# EAGLE board wagband_chestpiece_postroute (EAGLE 7.5.0)
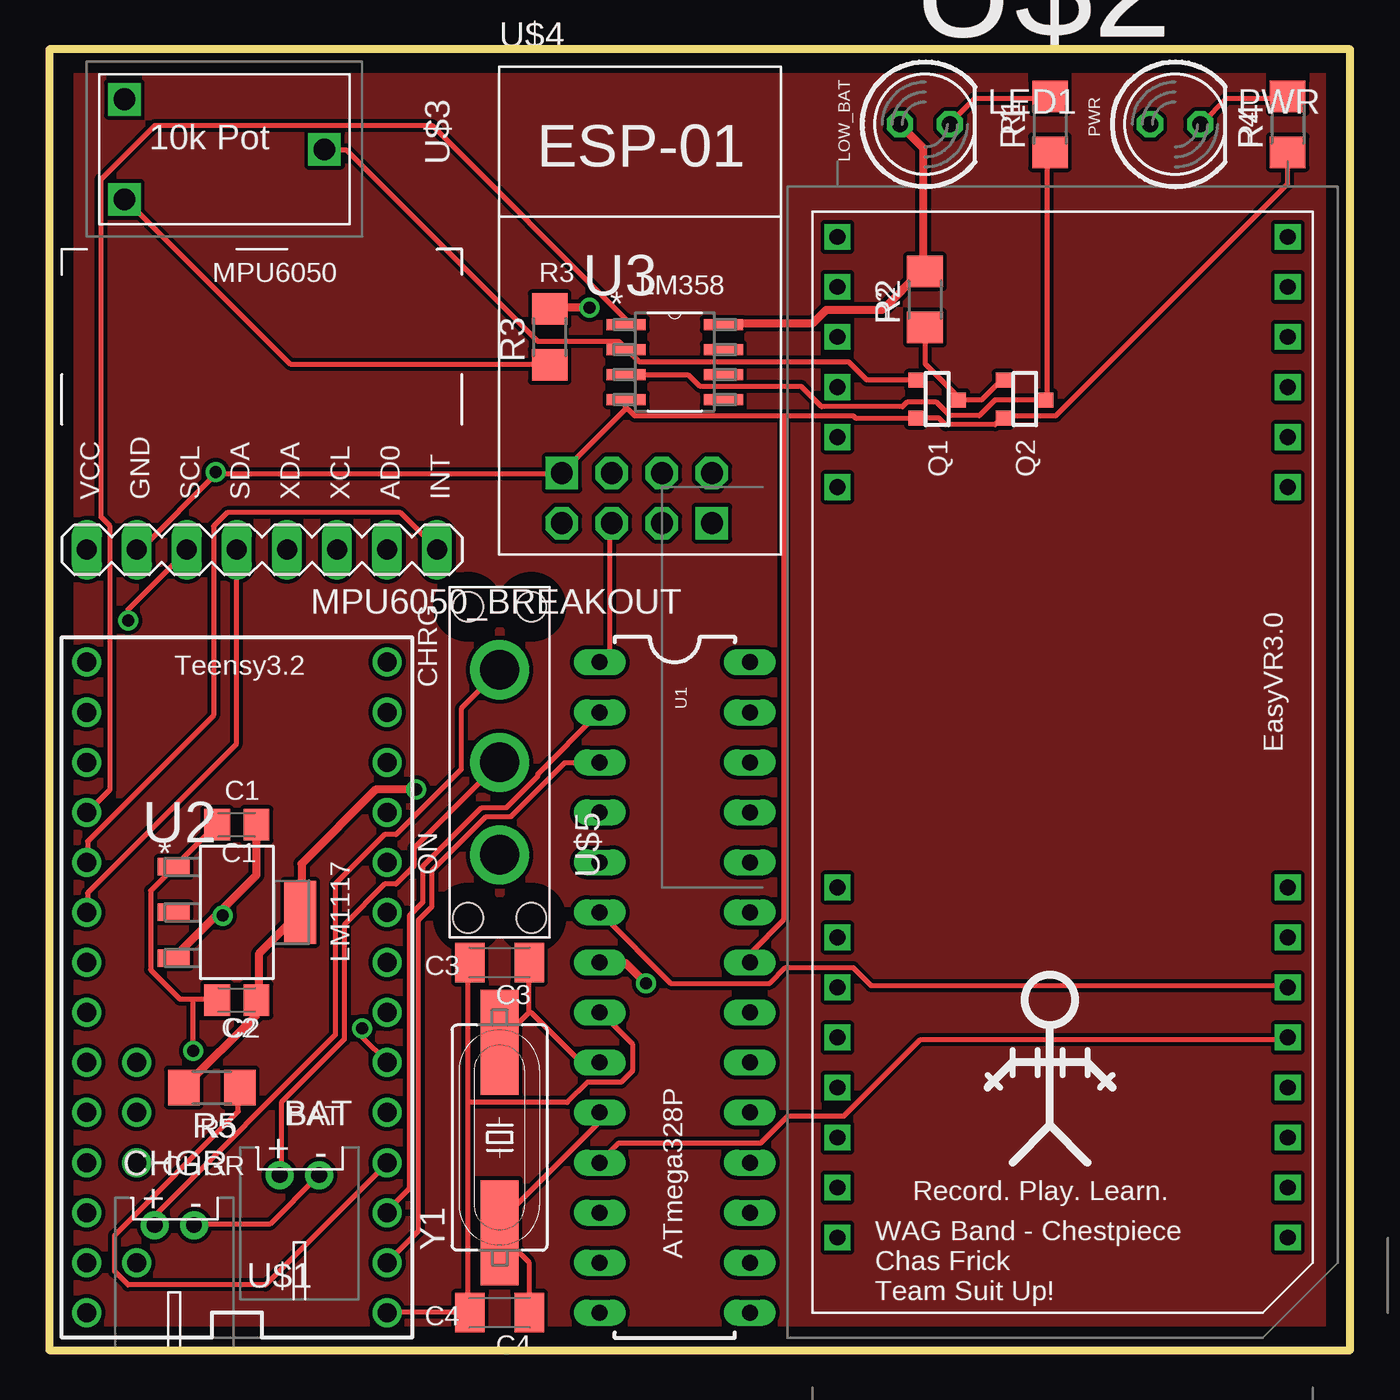
[diagram p0: board, top side]
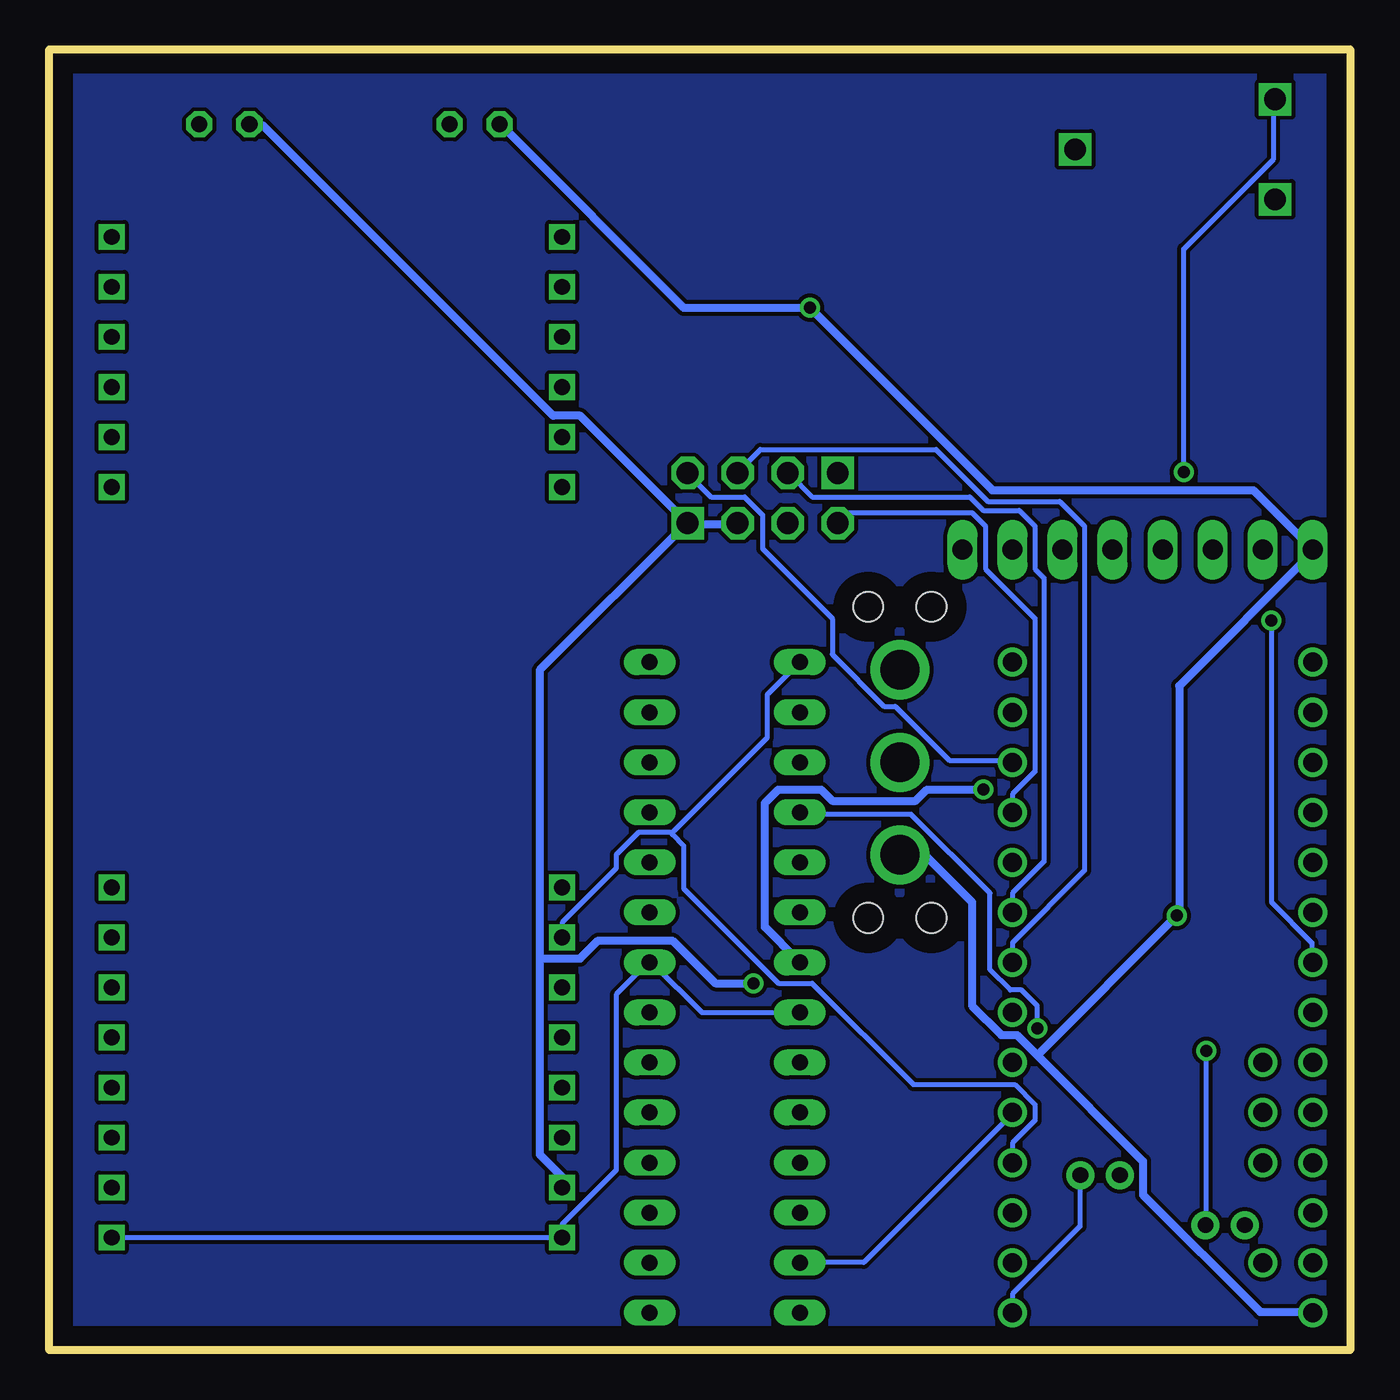
[diagram p1: board, bottom side, seen from below]

Size 66.04 x 66.04 mm. Coordinates in mm from the lower left corner, seen from the top.
Outline: 0,0 66.04,0 66.04,66.04 0,66.04 0,0
Copper layers (1*16): Top 0.035mm / dielectric 1.5mm / Bottom 0.035mm
Design rules "default": minimum track width 10mil, minimum drill 24mil, track to track 8mil, track to pad 8mil, pad to pad 8mil, via to via 8mil, smd to smd 8mil, copper to edge 40mil, drill to drill 8mil, minimum pad ring 10mil, minimum via ring 8mil, stop-mask expansion 4mil, vias tented up to drill 0mil, thermal gap 10mil
Net classes: 1 GND: width 0.406 mm; 2 PWR: width 0.406 mm

## Footprints (pad centres in the part's own frame; a part is rotated, then mirrored left to right if it is on the bottom)
JST-PH-2-THM-RA = drill 0.8 pad 1.422: 1 1,0; 2 -1,0
C0805K = smd 1.3 x 1.6: 1 -1,0; 2 1,0
C1206K = smd 1.5 x 2: 1 -1.5,0; 2 1.5,0
LED5MM = drill 0.813 octagon: A -1.27,0; K 1.27,0
MPU6050 = drill 1.016 long: ADD 6.35,0; GND -6.35,0; INT 8.89,0; SCL -3.81,0; SDA -1.27,0; VCC -8.89,0; XCL 3.81,0; XDA 1.27,0
SOT-23 = smd 0.762 x 0.762: 1 -0.979,-1.101; 2 0.94,-1.101; 3 0.025,1.067
R1206 = smd 1.6 x 1.803: 1 -1.422,0; 2 1.422,0
DIL28-3 = drill 0.813 long: 1 -16.51,-3.81; 2 -13.97,-3.81; 3 -11.43,-3.81; 4 -8.89,-3.81; 5 -6.35,-3.81; 6 -3.81,-3.81; 7 -1.27,-3.81; 8 1.27,-3.81; 9 3.81,-3.81; 10 6.35,-3.81; 11 8.89,-3.81; 12 11.43,-3.81; 13 13.97,-3.81; 14 16.51,-3.81; 15 16.51,3.81; 16 13.97,3.81; 17 11.43,3.81; 18 8.89,3.81; 19 6.35,3.81; 20 3.81,3.81; 21 1.27,3.81; 22 -1.27,3.81; 23 -3.81,3.81; 24 -6.35,3.81; 25 -8.89,3.81; 26 -11.43,3.81; 27 -13.97,3.81; 28 -16.51,3.81
SOT230P700X180-4N = smd 1.626 x 0.889: 1 -3.2,2.311; 2 -3.2,0; 3 -3.2,-2.311 | smd 1.626 x 3.175: 4 3.2,0
SOIC127P600X175-8N = smd 1.981 x 0.559: 1 -2.464,1.905; 2 -2.464,0.635; 3 -2.464,-0.635; 4 -2.464,-1.905; 5 2.464,-1.905; 6 2.464,-0.635; 7 2.464,0.635; 8 2.464,1.905
TEENSY3-DIL+4 = drill 0.965: 0 -7.62,13.97; 1 -7.62,11.43; 2 -7.62,8.89; 3 -7.62,6.35; 3.3V 7.62,11.43; 4 -7.62,3.81; 5 -7.62,1.27; 6 -7.62,-1.27; 7 -7.62,-3.81; 8 -7.62,-6.35; 9 -7.62,-8.89; 10 -7.62,-11.43; 11 -7.62,-13.97; 12 -7.62,-16.51; 13 7.62,-16.51; 14/A0 7.62,-13.97; 15/A1 7.62,-11.43; 16/A2 7.62,-8.89; 17/A3 7.62,-6.35; 18/A4 7.62,-3.81; 19/A5 7.62,-1.27; 20/A6 7.62,1.27; 21/A7 7.62,3.81; 22/A8 7.62,6.35; 23/A9 7.62,8.89; A10 5.08,6.35; A11 5.08,3.81; AGND 7.62,13.97; AREF 5.08,8.89; GND -7.62,16.51; VIN 7.62,16.51; VUSB 5.08,13.97
EASYVR_3_0 = drill 0.8 square: P$1 -11.43,25.4; P$2 -11.43,22.86; P$3 -11.43,20.32; P$4 -11.43,17.78; P$5 -11.43,15.24; P$6 -11.43,12.7; P$7 -11.43,-7.62; P$8 -11.43,-10.16; P$9 -11.43,-12.7; P$10 -11.43,-15.24; P$11 -11.43,-17.78; P$12 -11.43,-20.32; P$13 -11.43,-22.86; P$14 -11.43,-25.4; P$15 11.43,-25.4; P$16 11.43,-22.86; P$17 11.43,-20.32; P$18 11.43,-17.78; P$19 11.43,-15.24; P$20 11.43,-12.7; P$21 11.43,-10.16; P$22 11.43,-7.62; P$23 11.43,12.7; P$24 11.43,15.24; P$25 11.43,17.78; P$26 11.43,20.32; P$27 11.43,22.86; P$28 11.43,25.4
CB10 = drill 1.1 square: P$1 -2.54,-5.08; P$2 2.54,-5.08; P$3 0,5.08
ESP01 = drill 1.1 octagon: CH_PD -1.285,-8.178; GPIO0 1.255,-5.638; GPIO2 -1.285,-5.638; RST 1.255,-8.178; RX 3.795,-5.638; TX -3.825,-8.178 | drill 1.1 square: GND -3.825,-5.638; VCC 3.795,-8.178
SPDT = drill 2: P$1 0,-4.699; P$2 0,0; P$3 0,4.699 | hole 1.5: 1.6,7.899; -1.6,-7.899; 1.6,-7.899; -1.6,7.899
HC49UP = smd 5.334 x 1.93: 1 -4.826,0; 2 4.826,0

## Placement (x,y rotation side)
BAT  [JST-PH-2-THM-RA]  12.7,8.89 180 top
C1  105  [C0805K]  9.53,26.67 180 top
C2  105  [C0805K]  9.53,17.78 180 top
C3  22pF  [C1206K]  22.86,19.68 180 top
C4  22pF  [C1206K]  22.86,1.91 180 top
CHGR  [JST-PH-2-THM-RA]  6.35,6.35 180 top
LED1  [LED5MM]  44.45,62.23 0 top
MPU6050_BREAKOUT  [MPU6050]  10.79,40.64 0 top
PWR  [LED5MM]  57.15,62.23 0 top
Q1  [SOT-23]  45.09,48.26 270 top
Q2  [SOT-23]  49.53,48.26 270 top
R1  1k  [R1206]  50.8,62.23 90 top
R2  30k  [R1206]  44.45,53.34 90 top
R3  30k  [R1206]  25.4,51.44 90 top
R4  1k  [R1206]  62.87,62.23 90 top
R5  10k  [R1206]  8.26,13.34 180 top
U1  ATMEGA328P_PDIP  [DIL28-3]  31.75,18.41 270 top
U2  TLV1117-33CDCY  [SOT230P700X180-4N]  9.53,22.23 0 top
U3  LM358DR  [SOIC127P600X175-8N]  31.75,50.16 0 top
U$1  TEENSY_3.1_DIL+4  [TEENSY3-DIL+4]  9.53,18.41 180 top
U$2  EASYVR_3_0  [EASYVR_3_0]  51.44,31.11 0 top
U$3  CB10LV103M  [CB10]  8.89,60.96 270 top
U$4  ESP01  [ESP01]  29.84,50.16 0 top
U$5  MS12ASW13  [SPDT]  22.86,29.84 0 top
Y1  16MHz  [HC49UP]  22.86,10.79 90 top

## Library data of the parts
BAT CHGR = adafruit
C1 C2 R1-R5 = resistor
C3 C4 = rcl
LED1 PWR = led
MPU6050_BREAKOUT Q1 Q2 U$2-U$5 = mqp_custom_parts
U1 = SparkFun-DigitalIC
U2 = Texas Instruments_By_element14_Batch_1; MPN: TLV1117-33CDCY; OC_FARNELL: 1494942; OC_NEWARK: 67K8520; PACKAGE: SOT-223-3; SUPPLIER: TEXAS INSTRUMENTS
U3 = Texas Instruments_By_element14_Batch_1; MPN: LM358DR; OC_FARNELL: 1831865; OC_NEWARK: 34K7599; PACKAGE: SOIC-8; SUPPLIER: Texas Instruments
U$1 = Teensy_3_and_LC_Series_Boards_v1.1
Y1 = SparkFun-FreqCtrl

## Nets
3.3V: U$1.3.3V
5V: U$2.P$16
!RST: R5.1 U1.1 U$1.2 U$2.P$8 U$4.CH_PD
+3V3 [PWR]: C2.1 PWR.A R5.2 U1.7 U2.4 U$2.P$13 U$4.RST U$4.VCC
AGND: U$1.AGND
AREF: U$1.AREF
GND: BAT.2 C1.2 C2.2 C3.2 C4.2 CHGR.2 MPU6050_BREAKOUT.GND Q1.2 Q2.2 R4.1 U1.8 U1.22 U2.1 U3.4 U$1.GND U$2.P$14 U$2.P$15 U$3.P$1 U$4.GND
N$1: U1.4 U$1.4
N$2: U$1.10 U$4.RX
N$3: MPU6050_BREAKOUT.SDA U$1.18/A4
N$4: Q1.1 U3.2 U$3.P$3
N$5: U1.11 U$2.P$19
N$6: U1.6 U$2.P$20
N$8: MPU6050_BREAKOUT.INT U$1.17/A3
N$9: Q1.3 Q2.1 R2.1
N$10: Q2.3 R1.1 U3.3
N$11: R3.1 U$3.P$2
N$12: LED1.K R1.2
N$13: U1.2 U$1.1
N$14: U3.1 U$1.16/A2
N$15: PWR.K R4.2
N$16: U1.13 U$1.3
N$17: MPU6050_BREAKOUT.SCL U$1.19/A5
N$18: U$1.6 U$4.GPIO0
N$19: U$1.9 U$4.TX
N$20: C3.1 U1.9 Y1.2
N$21: C4.1 U1.10 Y1.1
N$22: U1.3 U$1.0
N$23: BAT.1 U$5.P$2
N$24: U$1.7 U$4.GPIO2
N$25: CHGR.1 U$5.P$3
V+ [PWR]: C1.1 LED1.A MPU6050_BREAKOUT.VCC R2.2 R3.2 U2.3 U3.8 U$1.VIN U$5.P$1
VDD: U$2.P$23
VUSB: U$1.VUSB

## Tracks (layer width: path | path; a pad name or v marks a point on that pad's centre or on a via)
!RST
  Top 0.254: R5.1 9.6,13.26 9.6,12.12 3.31,5.83 3.31,4 4,3.31 10.97,3.31 17.14,9.49 U$1.2 | U$4.CH_PD 28.46,41.95 28.46,35.43 28,34.98 U1.1
  Bottom 0.254: U$2.P$8 40.01,21.72 37.26,24.46 37.26,25.15 36.12,26.29 34.4,26.29 | 34.4,26.29 29.6,31.09 29.6,33.26 U1.1 | U$1.2 17.14,10.52 16,11.66 16,12.46 17.03,13.49 22.17,13.49 27.32,18.63 29.03,18.63 33.83,23.43 33.83,25.6 34.4,26.18 34.4,26.29
+3V3  (via drill 0.61)
  Top 0.406: R5.2 6.86,13.37 10.52,17.03 10.52,17.6 C2.1 10.63,17.83 10.63,20.12 12.69,22.17 U2.4 12.8,22.4 12.8,24.69 16.57,28.46 v18.63,28.46 | v30.29,18.63 29.26,19.66 28,19.66 U1.7
  Bottom 0.406: U$2.P$13 40.01,8.8 41.15,9.94 41.15,19.89 | 41.15,19.89 41.15,34.52 33.72,41.95 U$4.VCC | v30.29,18.63 32.23,18.63 34.4,20.8 38.18,20.8 39.09,19.89 41.15,19.89 | PWR.A 55.78,62.18 55.21,62.18 40.46,47.43 39.09,47.43 33.72,42.06 U$4.VCC | U$4.RST 31.2,41.95 33.49,41.95 U$4.VCC | v18.63,28.46 21.49,28.46 22.06,27.89 26.29,27.89 26.86,28.46 29.03,28.46 29.72,27.77 29.72,21.49 28,19.77 U1.7
GND  (via drill 0.61)
  Top 0.254: U$1.GND 17.14,1.94 21.26,1.94 C4.2 21.26,2.06 21.26,12.57 | 21.26,12.57 21.26,19.66 C3.2 | 7.32,17.83 6.63,17.83 5.14,19.32 5.14,23.32 6.29,24.46 U2.1 6.4,24.57 8.46,26.63 C1.2 | 7.32,17.83 8.46,17.83 C2.2 | CHGR.2 7.43,6.4 11.2,6.4 13.6,8.8 BAT.2 | v7.32,15.2 7.32,17.83 | 21.26,12.57 26.29,12.57 27.32,13.6 29.03,13.6 29.6,14.17 29.6,15.54 28,17.14 U1.8 | R4.1 62.87,59.21 51.09,47.43 48.46,47.43 Q2.2 48.35,47.32 48.01,46.98 45.49,46.98 45.15,47.32 Q1.2 40.92,47.32 40.8,47.43 37.26,47.43 | 29.26,47.78 29.26,48.23 U3.4 | 29.26,47.78 26.06,44.58 U$4.GND 25.95,44.46 8.46,44.46 | 8.46,44.46 4.69,40.69 4.46,40.69 MPU6050_BREAKOUT.GND | v8.46,44.58 8.46,44.46 | 37.26,47.43 29.72,47.43 29.38,47.78 29.26,47.78 | 37.26,47.43 37.26,21.83 35.66,20.23 35.66,19.77 U1.22
  Bottom 0.254: v7.32,15.2 7.32,6.4 CHGR.2 | U$1.GND 17.14,2.86 13.72,6.29 13.72,8.8 BAT.2 | U$2.P$15 U$2.P$14 40.01,6.4 37.26,9.14 37.26,18.06 35.66,19.66 U1.22 35.43,19.66 32.92,17.14 U1.8 | v8.46,44.58 8.46,55.89 3.89,60.47 3.89,63.44 U$3.P$1
N$1  (via drill 0.61)
  Top 0.254: v15.89,16.34 15.89,15.89 17.14,14.63 U$1.4
  Bottom 0.254: v15.89,16.34 15.89,17.49 16.69,18.29 17.26,18.29 18.29,19.32 18.29,23.2 22.29,27.2 27.89,27.2 U1.4
N$2
  Bottom 0.254: U$1.10 17.14,29.95 20.34,29.95 23.09,32.69 23.66,32.69 26.29,35.32 26.29,37.15 29.83,40.69 29.83,42.41 30.75,43.32 32.46,43.32 33.6,44.46 U$4.RX
N$3
  Top 0.254: U$1.18/A4 1.94,22.29 1.94,23.2 9.49,30.75 9.49,40.58 MPU6050_BREAKOUT.SDA
N$4
  Top 0.254: Q1.1 43.89,49.26 41.49,49.26 40.58,50.18 29.95,50.18 29.38,50.75 U3.2 29.26,50.86 28.92,51.21 24.8,51.21 15.09,60.92 14.06,60.92 U$3.P$3
N$5
  Top 0.254: U$2.P$19 62.87,15.77 44.23,15.77 40.35,11.89 37.49,11.89 36.12,10.52 28.92,10.52 28,9.6 U1.11
N$6
  Top 0.254: U$2.P$20 62.87,18.52 41.72,18.52 40.8,19.43 37.38,19.43 36.58,18.63 31.55,18.63 28,22.17 U1.6
N$7
  pour Bottom: 0,66.04 0,0 66.04,0 66.04,66.04
N$8
  Top 0.254: U$1.17/A3 1.94,24.8 1.94,25.83 8.34,32.23 8.34,41.83 9.03,42.52 17.83,42.52 19.66,40.69 MPU6050_BREAKOUT.INT
N$9
  Top 0.254: Q2.1 48.35,49.26 47.32,48.23 Q1.3 46.18,48.35 44.46,50.06 44.46,51.89 R2.1
N$10
  Top 0.254: R1.1 50.75,60.81 50.63,60.69 50.63,48.23 Q2.3 48.01,48.23 47.21,47.43 45.72,47.43 45.03,48.12 43.55,48.12 43.32,47.89 39.2,47.89 38.18,48.92 33.03,48.92 32.46,49.49 29.38,49.49 U3.3
N$11
  Top 0.254: R3.1 25.38,50.06 12.23,50.06 3.89,58.41 U$3.P$2
N$12
  Top 0.254: R1.2 50.75,63.55 46.98,63.55 45.72,62.29 LED1.K
N$13
  Top 0.254: U1.2 27.89,32.35 24.8,29.26 24.8,29.15 23.2,27.55 21.95,27.55 18.97,24.57 18.97,22.75 18.29,22.06 18.29,8.23 17.14,7.09 U$1.1
N$14
  Top 0.254: U3.1 29.26,52.12 29.26,52.35 19.43,62.18 5.37,62.18 2.63,59.44 2.63,42.29 3.09,41.83 3.09,28.46 1.94,27.32 U$1.16/A2
N$15
  Top 0.254: R4.2 62.87,63.55 59.78,63.55 58.52,62.29 PWR.K
N$16
  Bottom 0.254: U1.13 27.89,4.46 24.69,4.46 17.14,12 U$1.3
N$17  (via drill 0.61)
  Top 0.254: v4,37.03 4,37.6 6.97,40.58 MPU6050_BREAKOUT.SCL
  Bottom 0.254: v4,37.03 4,22.75 1.94,20.69 1.94,19.77 U$1.19/A5
N$18
  Bottom 0.254: U$1.6 17.14,20.69 13.49,24.35 13.49,41.83 14.74,43.09 18.4,43.09 21.03,45.72 29.95,45.72 31.09,44.58 U$4.GPIO0
N$19
  Bottom 0.254: U$1.9 17.14,28.23 16,29.38 16,37.15 18.52,39.66 18.52,41.83 19.2,42.52 25.49,42.52 25.95,42.06 U$4.TX
N$20
  Top 0.254: 24.35,17.14 24.35,19.66 C3.1 | 24.35,17.14 22.86,15.66 Y1.2 | U1.9 27.89,14.63 26.98,14.63 24.46,17.14 24.35,17.14
N$21
  Top 0.254: C4.1 24.35,1.94 24.35,4.46 22.86,5.94 Y1.1 22.86,6.51 27.89,11.54 27.89,12 U1.10
N$22
  Top 0.254: U1.3 27.89,29.83 26.18,29.83 23.43,27.09 22.17,27.09 19.43,24.35 19.43,22.52 18.75,21.83 18.75,6.06 17.14,4.46 U$1.0
N$23
  Top 0.254: BAT.1 11.77,8.91 11.77,12.57 14.97,15.77 14.97,21.6 17.03,23.66 17.6,23.66 18.52,24.57 18.52,25.49 U$5.P$2
N$24
  Bottom 0.254: U$1.7 17.14,23.2 15.54,24.8 15.54,39.2 16,39.66 16,41.83 16.8,42.63 18.63,42.63 19.32,43.32 27.32,43.32 28.46,44.46 U$4.GPIO2
N$25
  Top 0.254: CHGR.1 5.37,6.4 5.37,6.86 14.52,16 14.52,23.66 17.03,26.18 17.6,26.18 20.92,29.49 20.92,32.58 22.86,34.52 U$5.P$3
N$26
  pour Top: 0,66.04 0,0 66.04,0 66.04,66.04
V+  (via drill 0.61)
  Top 0.406: 8.57,22.17 6.4,20 U2.3 | 8.57,22.17 10.52,24.12 10.52,26.63 C1.1 | v8.8,22.06 8.69,22.06 8.57,22.17 | v27.43,52.92 25.49,52.92 R3.2 | LED1.A 43.2,62.18 44.35,61.04 44.35,54.86 R2.2 44.23,54.75 42.29,52.81 39.43,52.81 38.75,52.12 34.29,52.12 U3.8
  Bottom 0.406: 15.89,14.97 16.92,16 17.72,16 19.2,17.49 19.2,22.75 21.6,25.15 U$5.P$1 | 15.89,14.97 10.52,9.6 10.52,7.89 4.57,1.94 1.94,1.94 U$1.VIN | 15.89,14.97 v8.8,22.06 8.69,22.17 8.69,33.72 1.94,40.46 MPU6050_BREAKOUT.VCC 1.94,40.69 4.92,43.66 18.17,43.66 v27.43,52.92 33.83,52.92 43.09,62.18 LED1.A

## Text on the board
tPlace: R1 | R4 | PWR | LOW_BAT | MPU6050 | R3 | LM358 | R2 | VCC | GND | SCL | SDA | XDA | XCL | AD0 | INT | EasyVR3.0 | Teensy3.2 | CHRG | C1 | ON | LM1117 | C3 | C2 | ATmega328P | R5 | BAT | CHGR | Record. Play. Learn. | WAG Band - Chestpiece / Chas Frick / Team Suit Up! | C4